# Altium PCB final test with protection.PcbDoc
Units mm, origin at the board's own origin, x right, y up, seen from the top; angles counter-clockwise.
Board outline 152.4 x 101.6 mm, 2 copper layers (Top Layer, Bottom Layer); 17 components, 18 nets, 72 pads, 0 vias.
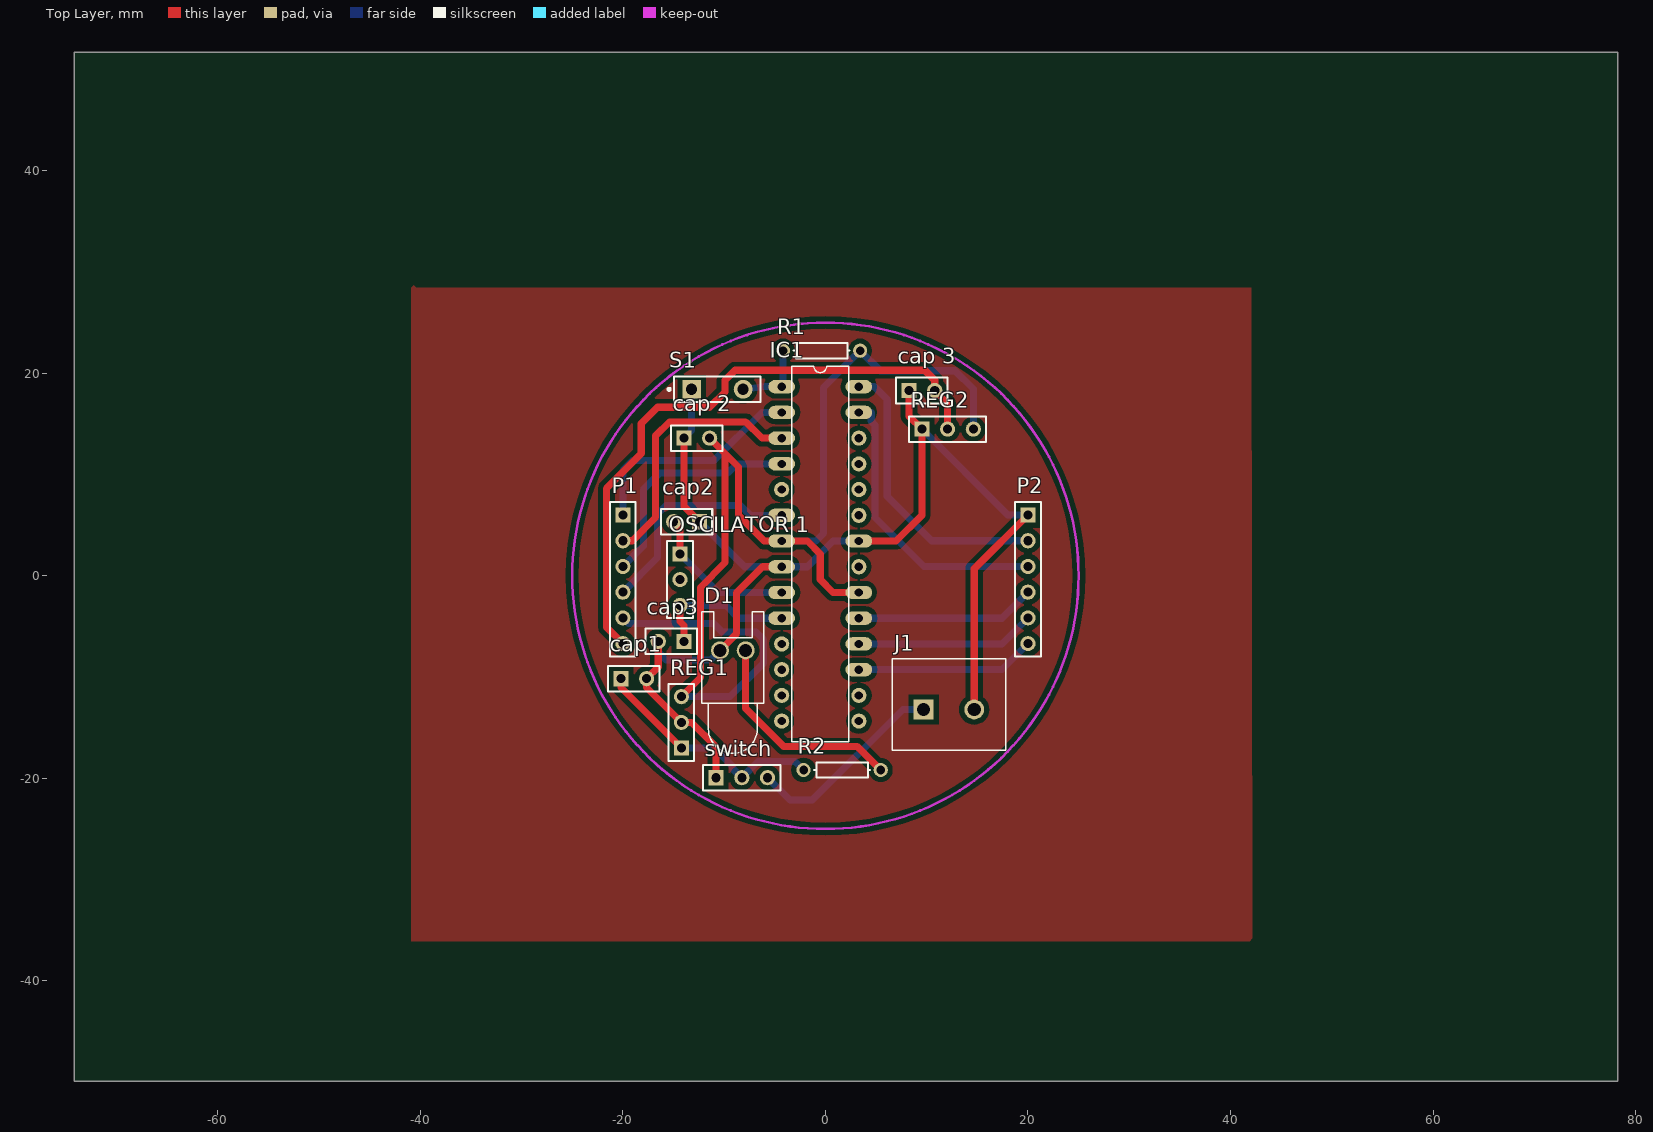
[diagram p0: Top Layer view]
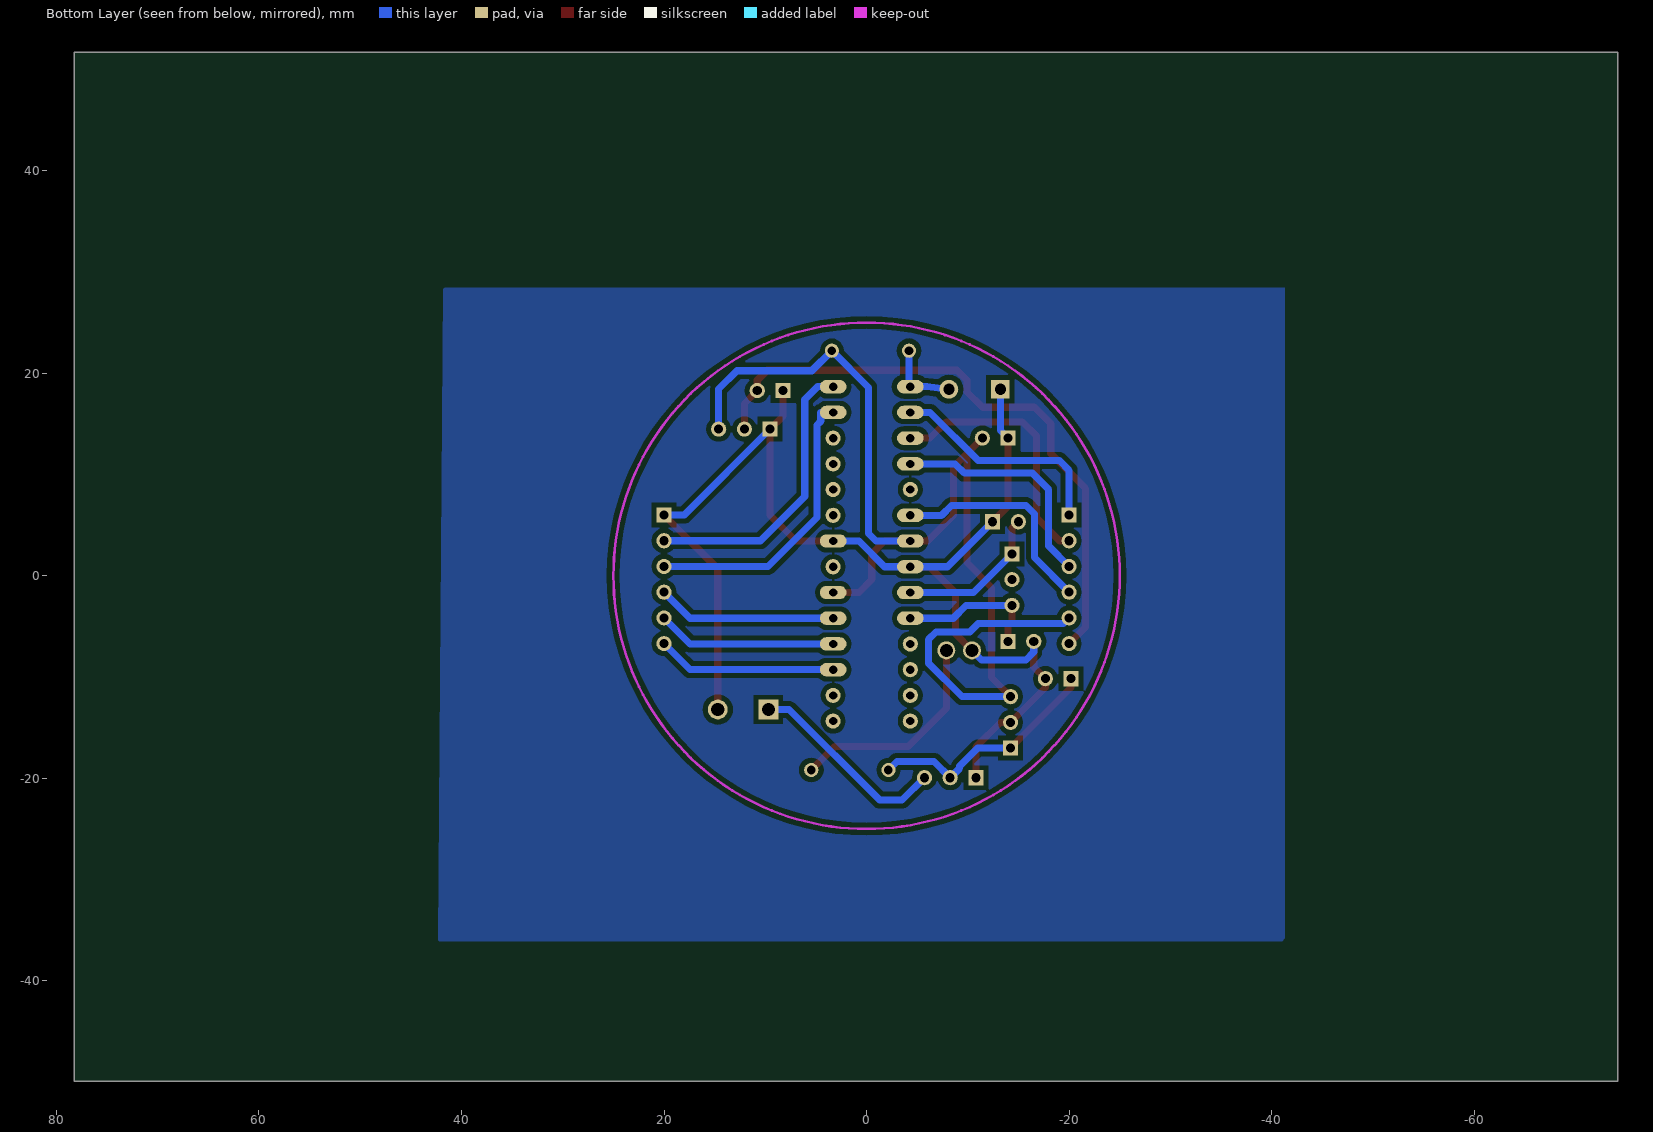
[diagram p1: Bottom Layer view, seen from below]

## Layer stack, top to bottom
Top Solder: solder mask 0.0102, Solder Resist, Dk 3.5
Top Layer: signal copper 0.0356
Dielectric 1: dielectric 0.32, FR-4, Dk 4.8
Bottom Layer: signal copper 0.0356
Bottom Solder: solder mask 0.0102, Solder Resist, Dk 3.5

## Board outline
-74.168,-49.911 78.232,-49.911 78.232,51.689 -74.168,51.689

## Design rules (kind name [scope] priority, off if disabled: settings)
Clearance [All] p1: gap=0.5 ignorepadtopadclearanceinfootprint=FALSE
PolygonConnect [All] p1: connectstyle=Relief reliefconductorwidth=0.254 reliefentries=4 polygonreliefangle="90 Angle" airgapwidth=0.254
RoutingVias [All] p1: holewidth=0.711 width=1.27 viastyle="Through Hole" minholewidth=0.711 minwidth=1.27 maxholewidth=0.711 maxwidth=1.27
SolderMaskExpansion [All] p1: expansion=0.102
Width [All] p1: maxlimit=1 minlimit=0.5 preferedwidth=0.7
30 further rules are at their usual default settings.

## Components (designator, comment, footprint, x,y, rotation, side; value= is the part's Value field where it differs from the comment)
cap1 "Header 2" HDR1X2 -20.193,-10.16 r0 top
cap2 "Header 2" HDR1X2 -12.446,5.334 r180 top
cap3 "Header 2" HDR1X2 -13.97,-6.477 r180 top
"cap 2" "Header 2" HDR1X2 -13.97,13.589 r0 top
"cap 3" "Header 2" HDR1X2 8.255,18.288 r0 top
D1 "LED0" LED-0 -9.144,-7.366 r0 top
IC1 "ATMEGA328-PU" *DIL28 -0.508,2.159 r0 top
J1 "OSTTA020161" *OST_OSTTA020161 12.192,-13.208 r0 top
"OSCILATOR 1" "Header 3" HDR1X3 -14.351,2.159 r270 top
P1 "Header 6" HDR1X6 -20,6 r270 top
P2 "Header 6" HDR1X6 20,6 r270 top
R1 "Res1" AXIAL-0.3 -0.381,22.225 r0 top value=1K
R2 "Res1" AXIAL-0.3 1.651,-19.177 r0 top value=1K
REG1 "Header 3" HDR1X3 -14.224,-17.018 r90 top
REG2 "Header 3" HDR1X3 9.525,14.478 r0 top
S1 "SW-PB" SPST-2 -10.668,18.415 r0 top
switch "Header 3" HDR1X3 -10.795,-19.939 r0 top

## Footprints (in the part's own frame and the unit in brackets; to place one, negate y for a bottom-side part, rotate by r counter-clockwise, add the part's x,y. Pads: shape width x height; smd on the part's side, far side on the other; paste and mask are expansions set on the pad)
*DIL28 [mil]
  oval 104x52 hole 32: 1(-150,650) 2(-150,550) 3(-150,450) 4(-150,350) 6(-150,150) 7(-150,50) 8(-150,-50) 9(-150,-150) 10(-150,-250) 17(150,-450) 18(150,-350) 19(150,-250) 20(150,-150) 22(150,50) 27(150,550) 28(150,650)
  round 59.06 hole 32: 5(-150,250) 11(-150,-350) 12(-150,-450) 13(-150,-550) 14(-150,-650) 15(150,-650) 16(150,-550) 21(150,-50) 23(150,150) 24(150,250) 25(150,350) 26(150,450)
  silkscreen extent -110,-730 110,730
*OST_OSTTA020161 [mm]
  rect 1.95x1.95 hole 1.3: 1(-2.5,0)
  round 1.95 hole 1.3: 2(2.5,0)
  silkscreen extent -5.6,-4 5.6,5
AXIAL-0.3 [mm] "Axial Device, Thru-Hole; 2 Leads; 0.3 in Pin Spacing"
  round 1.4 hole 0.85: 1(-3.81,0) 2(3.81,0)
  silkscreen extent -2.77,-0.76 2.77,0.76
HDR1X2 [mm] "Connector; Header; 2 Position"
  rect 1.5x1.5 hole 0.9: 1(0,0)
  round 1.5 hole 0.9: 2(2.54,0)
  silkscreen extent -1.27,-1.27 3.81,1.27
HDR1X3 [mm] "Connector; Header; 3 Position"
  rect 1.5x1.5 hole 0.9: 1(0,0)
  round 1.5 hole 0.9: 2(2.54,0) 3(5.08,0)
  silkscreen extent -1.27,-1.27 6.35,1.27
HDR1X6 [mm] "Connector; Header; 6 Position"
  rect 1.5x1.5 hole 0.9: 1(0,0)
  round 1.5 hole 0.9: 2(2.54,0) 3(5.08,0) 4(7.62,0) 5(10.16,0) 6(12.7,0)
  silkscreen extent -1.27,-1.27 13.97,1.27
LED-0 [mil] "LED; 2 Leads"
  round 70 hole 50: 1(50,0) 2(-50,0)
  silkscreen extent -120,-400 120,150
SPST-2 [mm] "Switch; 2 Leads"
  rect 1.85x1.85 hole 1.1: 1(-2.54,0)
  round 1.85 hole 1.1: 2(2.54,0)
  silkscreen extent -4.89,-1.27 4.28,1.27

## Part data
cap1 cap2 cap3 "cap 2" "cap 3": "Header, 2-Pin", LatestRevisionDate=17-Jul-2002, LatestRevisionNote="Re-released for DXP Platform.", Publisher="Altium Limited"
D1: "Typical INFRARED GaAs LED", LatestRevisionDate=08-Jul-2005, LatestRevisionNote="Mech Layer 1 removed.", PackageDescription="LED; 2 Leads", PackageReference=LED-0, Published=8-Jun-2000, Publisher="Altium Limited"
IC1: "ATmega Series 20 MHz 32 KB Flash 2 KB SRAM 8-Bit Microcontroller - DIP-28", Package="PDIP-28 Microchip", Availability=Unavailable, MF=Microchip, MP=ATMEGA328-PU, Price=None, SnapEDA_Link=https://www.snapeda.com/parts/ATMEGA328-PU/Microchip/view-part/?ref=snap
J1: "Connector Terminal Blocks 2 Position 5mm Solder Straight Thru-Hole 16A", Package=None, Availability=Unavailable, MF="On Shore", MP=OSTTA020161, Price=None, SnapEDA_Link=https://www.snapeda.com/parts/OSTTA020161/On%20Shore%20Technology%20Inc./view-part/?ref=snap
"OSCILATOR 1" REG1 REG2 switch: "Header, 3-Pin", LatestRevisionDate=17-Jul-2002, LatestRevisionNote="Re-released for DXP Platform.", Publisher="Altium Limited"
P1 P2: "Header, 6-Pin", LatestRevisionDate=17-Jul-2002, LatestRevisionNote="Re-released for DXP Platform.", Publisher="Altium Limited"
R1 R2: "Resistor", LatestRevisionDate=17-Jul-2002, LatestRevisionNote="Re-released for DXP Platform.", PackageDescription="Axial Device, Thru-Hole; 2 Leads; 0.3 in Pin Spacing", PackageReference=AXIAL-0.3, Published=8-Jun-2000, Publisher="Altium Limited"
S1: "Switch", LatestRevisionDate=17-Jul-2002, LatestRevisionNote="Re-released for DXP Platform.", PackageDescription="Switch; 2 Leads", PackageReference=SPST-2, Published=24-Mar-1999, Publisher="Altium Limited"

## Nets (pads, with @x,y where several pads share a name; then routed paths per layer and width w, separated by ;. In a path a pad name is that pad's centre, name@x,y a point inside that pad or via, vN(x,y) a via of type N, cw(c..) or ccw(c..) an arc to the next point about the centre after c; other vN are vias at no path point)
"3.3 volt": "cap 3.2" P1.6 REG2.2 | length 61.4
  Top Layer w0.7: P1.6 -21.615,-5.085 -21.615,8.636 -18.186,12.065 -18.186,15.037 -16.586,16.637 -11.43,16.637 -9.906,18.161 -9.906,19.304 -8.915,20.295 9.804,20.295 10.795,19.304 10.795,18.288 12.065,17.018 REG2.2
"5 volt": "cap 2.2" IC1.7 IC1.20 P1.5 R1.2 REG1.3 REG2.3 | length 118.4
  Top Layer w0.7: REG1.3 -12.344,-10.058 -12.344,-1.143 -9.906,1.295 -9.906,12.065 ; -11.43,13.589 -9.906,12.065 ; IC1.20 0.762,-1.651 -0.508,-0.381 -0.508,2.159 -1.778,3.429 IC1.7 -6.045,3.429 -8.585,5.969 -8.585,10.744 -9.906,12.065
  Bottom Layer w0.7: P1.5 -19.461,-4.699 -11.024,-4.699 -10.185,-5.537 -6.858,-5.537 -6.121,-6.274 -6.121,-8.636 -9.423,-11.938 REG1.3 ; IC1.7 -0.94,3.429 -0.203,4.166 -0.203,18.593 R1.2 5.41,20.244 12.802,20.244 14.605,18.44 REG2.3
BATTERY: J1.1 switch.3 | length 20
  Bottom Layer w0.7: switch.3 -3.505,-22.149 -1.295,-22.149 7.645,-13.208 J1.1
CS: IC1.6 P1.4 | length 22.1
  Bottom Layer w0.7: P1.4 -16.586,1.794 -16.586,6.096 -15.748,6.934 -8.382,6.934 -7.417,5.969 IC1.6
GND: "cap 2.1" "cap 3.1" cap1.2 cap2.1 cap3.2 D1.2 IC1.8 IC1.22 J1.2 P2.1 REG1.2 REG2.1 S1.1 switch.1 | length 125.3
  Top Layer w0.7: cap3.2 -16.51,-9.017 cap1.2 -17.653,-11.049 REG1.2 -13.208,-14.478 -10.795,-16.891 switch.1 ; -13.97,13.589 -13.97,6.858 cap2.1 ; D1.2 -8.763,-5.715 -8.763,-1.651 -6.223,0.889 IC1.8 ; IC1.22 6.985,3.429 9.525,5.969 REG2.1 8.255,15.748 8.255,18.288 ; J1.2 14.692,0.692 P2.1
  Bottom Layer w0.7: cap3.2 -16.51,-7.544 -15.748,-8.306 -11.354,-8.306 D1.2 ; -13.97,13.589 -13.208,14.351 S1.1 ; cap2.1 -8.001,0.889 IC1.8 -1.778,0.889 0.762,3.429 IC1.22 ; REG2.1 18.003,6 P2.1
INT: IC1.4 P1.3 | length 23.1
  Bottom Layer w0.7: P1.3 -17.983,2.937 -17.983,8.509 -16.358,10.135 -9.652,10.135 -8.738,11.049 IC1.4
MISO: IC1.18 P2.5 | length 17.8
  Bottom Layer w0.7: IC1.18 17.429,-6.731 P2.5
MOSI: IC1.17 P2.6 | length 17.8
  Bottom Layer w0.7: IC1.17 17.429,-9.271 P2.6
NetD1_1: D1.1 R2.2 | length 21.6
  Top Layer w0.7: D1.1 -7.874,-13.106 -4.14,-16.84 3.124,-16.84 R2.2
"OSCILATOR 1": "OSCILATOR 1.1" cap2.2 IC1.9 | length 15
  Top Layer w0.7: cap2.2 -14.351,4.699 -14.351,2.159
  Bottom Layer w0.7: -14.351,2.159 -10.541,-1.651 IC1.9
"OSCILATOR 2": "OSCILATOR 1.3" cap3.1 IC1.10 | length 14.3
  Top Layer w0.7: -14.351,-2.921 -14.351,-4.521 -13.97,-4.902 cap3.1
  Bottom Layer w0.7: -14.351,-2.921 -9.83,-2.921 -8.56,-4.191 IC1.10
RESET: IC1.1 R1.1 S1.2 | length 7.5
  Bottom Layer w0.7: S1.2 -5.969,18.669 IC1.1 -4.191,18.669 R1.1
RX: IC1.2 P1.1 | length 22.5
  Bottom Layer w0.7: P1.1 -20,10.414 -19.035,11.379 -11.024,11.379 -6.274,16.129 IC1.2
SCK: IC1.19 P2.4 | length 17.8
  Bottom Layer w0.7: IC1.19 17.429,-4.191 P2.4
SCL: IC1.28 P2.2 | length 28.6
  Bottom Layer w0.7: IC1.28 4.832,18.669 6.102,17.399 6.102,7.843 10.485,3.46 P2.2
SDA: IC1.27 P2.3 | length 28.9
  Bottom Layer w0.7: IC1.27 4.521,16.129 4.521,15.265 4.902,14.884 4.902,5.741 9.723,0.92 P2.3
"Switch out": cap1.1 R2.1 REG1.1 switch.2 | length 23.7
  Top Layer w0.7: cap1.1 -20.193,-11.049 REG1.1
  Bottom Layer w0.7: REG1.1 -10.973,-17.018 -9.195,-18.796 -9.195,-18.999 switch.2 -6.655,-18.339 -2.997,-18.339 R2.1
TX: IC1.3 P1.2 | length 25.9
  Top Layer w0.7: P1.2 -19.044,3.46 -16.764,5.74 -16.764,13.824 -15.399,15.189 -7.874,15.189 -6.274,13.589 IC1.3
pads on no net: "OSCILATOR 1.2" IC1.5 IC1.11 IC1.12 IC1.13 IC1.14 IC1.15 IC1.16 IC1.21 IC1.23 IC1.24 IC1.25 IC1.26

## Polygon pours and split planes (outlines as drawn)
no net on Top Layer (solid, pour order 8): 42.037,28.448 -40.386,28.448 -40.64,28.702 -40.894,28.448 -40.894,-36.068 41.91,-36.068 42.164,-35.814
no net on Bottom Layer (solid, pour order 10): 41.783,28.321 41.656,28.448 -41.275,28.448 -41.275,-35.814 -41.021,-36.068 42.291,-36.068

## Keep-outs
Keep-Out Layer:
  circle w0.254: c0,0 r25